# Altium PCB AWT25-000093_ZIM1.PcbDoc (part 2 of 4)
Units mm, origin at the board's own origin, x right, y up, seen from the top; angles counter-clockwise.
Board outline 210 x 108 mm, 6 copper layers (Top Layer, Mid-Layer 1, Internal Plane 2, Power, Mid-Layer 2, Bottom Layer); 303 components, 298 nets, 1319 pads, 1113 vias.
Unrouted connection lines stored in the file: 85.
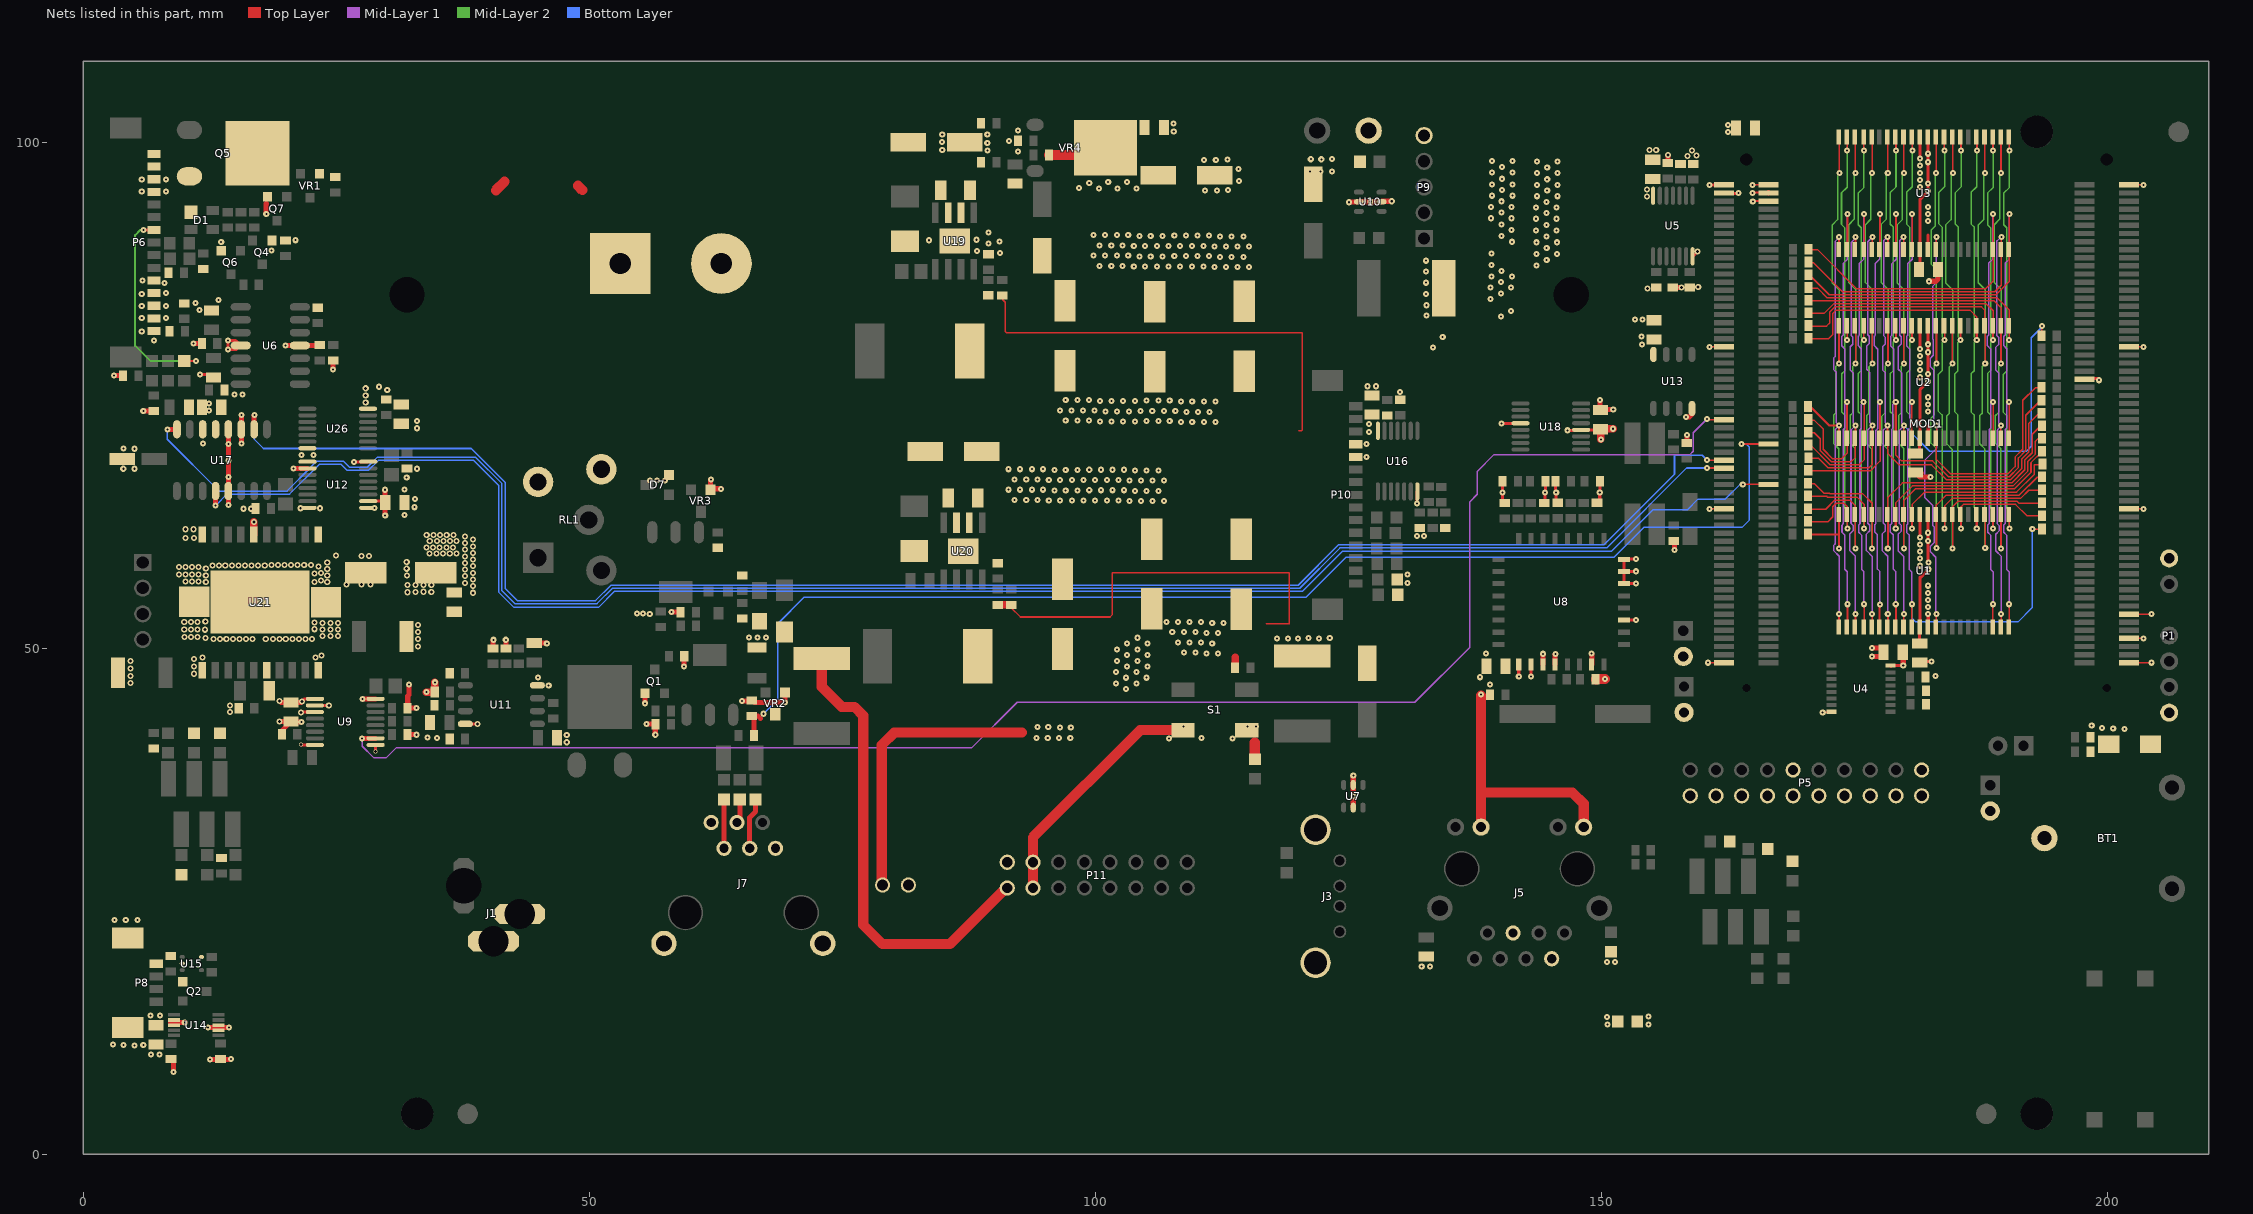
[diagram p6: the nets of this part, all layers, seen from the top]

## Via types
v1: diameter 0.6, hole 0.2, Top Layer to Bottom Layer, tented both sides, 894 vias
v2: diameter 0.6, hole 0.3, Top Layer to Bottom Layer, tented both sides, 199 vias
v3: diameter 0.6, hole 0.2, Top Layer to Bottom Layer, 18 vias
v4: diameter 0.4, hole 0.3, Top Layer to Bottom Layer, tented both sides, 2 vias

## Nets (pads, with @x,y where several pads share a name; then routed paths per layer and width w, separated by ;. In a path a pad name is that pad's centre, name@x,y a point inside that pad or via, vN(x,y) a via of type N, cw(c..) or ccw(c..) an arc to the next point about the centre after c; other vN are vias at no path point)
0VD: BT1.3 C1.2 C2.2 C3.2 C4.2 C5.2 C6.2 C16.2 C17.2 C18.2 C19.2 C20.2 C21.2 C22.2 C23.2 C24.2 C25.2 C28.2 C31.2 C32.2 C33.2 C34.2 C35.2 C36.2 C38.2 C39.2 C40.2 C41.2 C42.2 C47.2 C48.2 C49.2 C50.2 C51.2 C52.2 C53.2 C54.2 C55.2 C57.2 C58.2 C59.2 C60.2 C61.2 C62.2 C63.2 C64.2 C65.2 C66.2 C69.2 D3.2 D6.2 D7.2 D8.2 J1.2 J1.3 J5.10 J5.12 L8.1 L10.1 L25.1 L30.1 L36.1 L39.1 MOD1.A1 MOD1.A39 MOD1.A79 MOD1.A117 MOD1.B2 MOD1.B8 MOD1.B14 MOD1.B40 MOD1.B71 MOD1.B80 MOD1.B120 P1.7 P2.2 P4.2 P5.4 P5.6 P5.8 P5.10 P5.11 P5.12 P5.14 P5.16 P5.18 P5.20 P6.3 P6.4 P6.12 P6.13 P8.4 P8.5 P8.6 P10.11 P10.12 P11.3 P11.4 P12.2 P13.2 Q6.2 Q7.2 R38.2 R39.2 R42.2 R43.2 R57.2 R58.2 R69.2 R80.2 R81.2 R82.2 R83.2 R101.2 R107.2 R109.2 R110.2 R112.2 R118.2 R119.2 R124.2 RL1.A2 S1.3 S1.4 U1.12 U1.34 U2.12 U2.34 U3.12 U3.34 U4.8 U5.7 U6.11 U8.6 U8.7 U8.8 U8.27 U8.28 U8.31 U9.1 U9.3 U9.8 U9.9 U11.4 U12.1 U12.8 U12.9 U13.4 U14.2 U14.3 U15.2 U16.7 U17.11 U17.14 U18.4 U19.6 U19.9 U20.6 U20.9 U26.7 VR2.1 VR3.1 | length 175.9
  Top Layer w0.15: v1(160.518,48.565) MOD1.A1@162.1,48.565 ; v1(160.673,63.765) MOD1.A39@162.1,63.765 ; v1(160.673,79.765) MOD1.A79@162.1,79.765 ; v1(171.848,43.665) 172.729,43.665 U4.8@172.775,43.665 ; MOD1.B2@202.1,48.565 v1(204.307,48.565) ; MOD1.B8@202.1,50.965 v1(203.527,50.965) ; MOD1.B14@202.1,53.365 v1(204.307,53.365) ; MOD1.B40@202.1,63.765 v1(203.527,63.765) ; MOD1.B80@202.1,79.765 v1(203.527,79.765) ; MOD1.B120@202.1,95.765 v1(203.527,95.765)
  Top Layer w0.3: v1(11.55,77.05) C35.2@12.6,77.05 ; 15.179,79.5 v1(14.3,79.5) v1(14.3,80.4) 15.079,80.4 U6.11@15.579,79.9 ; v4(21.525,40.475) 21.555,40.445 U9.8@22.911,40.445 ; v2@21.595,43.695 U9.3@22.87,43.695 ; v2(21.65,44.75) 21.895,44.995 U9.1@22.911,44.995 ; U9.3@22.825,43.65 U9.3@22.87,43.695 ; U9.3@22.875,43.7 U9.3@22.87,43.695 ; U9.3@22.911,43.695 U9.3@22.87,43.695 ; v4(28.887,39.785) 28.887,40.432 U9.9@28.901,40.445 ; U11.4@37.769,42.52 38.97,42.52 v2(38.975,42.525) ; v3(131.75,64.275) 131.75,65.435 U16.7@131.8,65.485 U16.7@131.815,65.5 ; v1(140.109,72.201) 141.973,72.201 U18.4@141.993,72.221 ; v1(140.222,65.397) 140.222,64.559 C20.2@140.447,64.334 ; v1@140.223,65.398 R42.2@140.223,66.497 ; C21.2@144.347,64.334 144.422,64.409 v1(144.422,65.397) ; v1@144.459,65.434 R43.2@144.459,66.497 ; v1@145.46,65.459 R38.2@145.46,66.497 ; v1(145.522,65.397) 145.522,64.509 C18.2@145.672,64.359 ; C19.2@149.547,64.359 149.822,64.634 v1(149.822,65.397) ; v1@149.837,65.412 R39.2@149.837,66.475 ; v1(153.422,56.397) 152.247,56.397 U8.6@152.222,56.372 U8.7@152.222,57.572 ; v1(153.422,57.597) 152.247,57.597 U8.7@152.222,57.572 ; v1(153.422,58.797) 152.247,58.797 U8.8@152.222,58.772 U8.7@152.222,57.572 ; U5.7@159,88.71 v2(159.475,89.175) ; MOD1.A117@162.05,94.95 162.068,94.932 162.075,94.925 162.1,94.925 v1@163.5,94.925 ; U1.12@181.472,63.138 181.473,63.136 v1(181.473,60.946) ; U2.12@181.472,81.756 181.473,81.755 v1(181.473,79.564) ; v1@181.472,98.362 U3.12@181.472,100.438 ; C1.2@181.475,48.703 181.5,48.678 v1@182.489,48.678 ; C2.2@181.475,67.528 C2.2@181.681,67.322 ; U3.34@182.26,89.349 U3.34@182.272,89.338 ; U3.34@182.26,89.355 182.26,89.394 182.26,90.791 ; U1.34@182.272,52.038 182.272,52.094 v1@182.272,53.36 ; U2.34@182.272,70.656 182.272,70.744 182.272,71.978 ; MOD1.B71@197.654,76.621 197.7,76.621 198.999,76.621 v1(199.151,76.469)
  Top Layer w0.5: v1(10.9,80.1) R101.2@11.738,80.1 ; v1(12.325,12.525) 13.375,12.525 v1(14.4,12.525) ; v1(12.55,9.375) 13.575,9.375 v1@14.575,9.375 ; Q6.2@13.625,89.3 Q6.2@13.65,89.275 ; v1(15.65,70.225) 15.65,71.603 U17.11@15.63,71.623 15.65,71.643 v1(15.65,73.025) ; v1(18.1,92.9) 18.1,93.925 ; v2(19.425,44.775) 19.55,44.65 C47.2@20.55,44.65 21.55,44.65 v2(21.65,44.75) ; C47.2@20.425,44.775 20.45,44.75 C47.2@20.525,44.75 ; C47.2@20.5,44.775 C47.2@20.525,44.75 ; C47.2@20.55,44.725 C47.2@20.525,44.75 ; C47.2@20.55,44.75 C47.2@20.525,44.75 ; R83.2@41.775,49.987 v1@41.775,50.816 ; C39.2@44.575,50.5 v1@45.79,50.5 ; v1(55.65,42.5) R80.2@56.513,42.5 ; v1(56.525,41.45) 56.525,42.475 R80.2@56.525,42.488 ; v1@58.105,53.556 58.13,53.556 R109.2@59.018,53.556 ; VR3.1@61.994,65.646 v1@61.994,66.643 ; VR3.1@62.019,65.753 v1@63.004,65.753 ; v1(65.1,44.775) R82.2@65.988,44.775 ; R82.2@66.05,44.837 66.138,44.837 66.35,44.625 v1(69.35,44.625) VR2.1@69.35,45.608 ; U8.27@144.222,48.372 v1@144.222,49.447 ; U8.28@145.422,48.372 v1@145.422,49.397 ; U8.31@149.05,48.375 v1@149.05,49.45 ; v1(149.856,74.526) 149.856,73.576 149.906,73.576 v1(151.156,73.576) ; v1(158.325,72.85) 158.678,72.85 158.935,73.107 U13.4@158.935,73.683 ; C38.2@158.429,70.302 158.454,70.327 v1(158.454,71.052) ; v1(176.7,49.2) C5.2@177.8,49.2 ; v1(176.7,50) C5.2@177.7,50 ; C2.2@181,67.35 181.45,66.9 v1(182.5,66.9) ; v1(182.337,86.245) 183.045,86.245 183.25,86.45 C3.2@183.25,87.4
  Top Layer w1: P13.2@78.9,26.638 78.9,40.435 80.124,41.659 92.746,41.659 ; P11.3@93.821,26.313 93.821,28.853 93.821,31.312 104.418,41.909 ; 104.443,41.934 S1.3@107.967,41.934 ; L8.1@115.74,39.06 115.74,40.659 ; J5.12@138.105,32.325 v1@138.105,45.304 ; 138.135,35.736 147.132,35.736 148.235,34.632 J5.10@148.235,32.325 ; C23.2@149.482,46.933 149.499,46.95 v1(150.35,46.95)
  other v1: 14.6,9.4 6.7,9.85 7.55,9.85 5.069,10.768 3.994,10.793 5.95,10.8 2.969,10.843 154.63,12.817 154.655,13.616 3.119,23.14 4.219,23.14 5.394,23.165 47.783,40.709 107.267,41.059 113.55,41.1 96.42,41.109 97.52,41.109 34.961,41.134 94.196,41.134 95.295,41.134 110.475,41.15 34.036,41.159 47.783,41.434 96.495,42.184 97.57,42.184 94.271,42.209 95.345,42.209 115.025,42.25 115.875,42.25 108.725,42.275 138.075,45.425 138.975,46.4 137.985,47.133 182.6,48.7 145.45,49.425 144.225,49.45 138.6,49.475 149.025,49.475 45.808,50.482 41.759,50.832 65.8,51.05 66.625,51.05 67.45,51.075 182.26,53.371 55.981,53.381 55.331,53.406 54.706,53.431 58.13,53.581 182.26,54.071 182.26,54.771 182.26,55.471 182.26,56.171 181.473,58.146 181.473,58.846 181.473,59.546 181.473,60.246 31.775,63.15 21.5,63.825 23.425,63.825 28.8,63.85 32.75,63.925 103.368,64.528 104.493,64.528 105.643,64.528 106.793,64.528 95.395,64.578 96.52,64.578 97.67,64.578 98.82,64.578 99.969,64.603 101.144,64.603 102.269,64.603 91.996,64.653 93.171,64.653 94.296,64.653 32.775,64.75 103.918,65.528 105.043,65.528 106.218,65.528 95.945,65.578 97.07,65.578 98.245,65.578 99.394,65.603 100.544,65.603 101.694,65.603 102.819,65.603 91.421,65.653 92.571,65.653 93.721,65.653 94.846,65.653 31.75,65.675 63.004,65.728 56,66.55 103.368,66.553 104.493,66.553 105.643,66.553 106.793,66.553 56.7,66.575 57.475,66.575 95.395,66.603 96.52,66.603 97.67,66.603 98.82,66.603 99.969,66.628 101.144,66.628 102.269,66.628 62.029,66.678 91.996,66.678 93.171,66.678 94.296,66.678 103.918,67.553 105.043,67.553 106.218,67.553 95.945,67.603 97.07,67.603 98.245,67.603 99.394,67.628 100.544,67.628 101.694,67.628 102.819,67.628 91.421,67.678 92.571,67.678 93.721,67.678 94.846,67.678 3.975,67.725 5.1,67.725 21.6,69.075 22.775,69.075 5.075,69.7 4,69.725 11.85,70.225 32.975,71.725 32.975,72.425 182.26,73.389 12.45,73.5 182.26,74.089 12.45,74.175 182.26,74.789 181.473,76.764 181.473,77.464 181.473,78.164 181.473,78.864 133.361,79.699 134.31,80.724 153.3,82.45 154.025,82.45 11.5,83.4 5.8,83.8 8.2,83.8 11.1,84.1 13.4,84.4 5.8,85 8.2,85.1 111.766,87.647 112.891,87.647 114.041,87.647 115.19,87.647 103.793,87.697 104.918,87.697 106.068,87.697 107.217,87.697 108.367,87.722 109.542,87.722 110.667,87.722 100.394,87.772 101.569,87.772 102.694,87.772 112.316,88.647 113.441,88.647 114.616,88.647 104.343,88.697 105.468,88.697 106.643,88.697 107.792,88.722 108.942,88.722 110.092,88.722 111.216,88.722 99.819,88.772 100.969,88.772 102.119,88.772 103.243,88.772 90.597,89.022 88.297,89.222 111.766,89.672 112.891,89.672 114.041,89.672 115.19,89.672 103.793,89.722 104.918,89.722 106.068,89.722 107.217,89.722 108.367,89.747 109.542,89.747 110.667,89.747 100.394,89.797 101.569,89.797 102.694,89.797 89.447,89.972 90.547,90.172 83.548,90.297 88.272,90.347 112.316,90.672 113.441,90.672 114.616,90.672 104.343,90.722 105.468,90.722 106.643,90.722 107.792,90.747 108.942,90.747 110.092,90.747 111.216,90.747 99.819,90.797 100.969,90.797 102.119,90.797 103.243,90.797 89.447,91.072 182.26,92.185 182.26,92.885 182.26,93.585 163.525,94.95 5.8,95.1 8.2,95.1 110.817,95.196 112.016,95.196 113.116,95.245 181.473,95.56 114.191,96.17 181.473,96.26 5.8,96.3 8.2,96.3 181.473,96.96 121.189,97.095 122.239,97.095 123.363,97.095 114.141,97.32 181.473,97.66 110.717,98.22 111.891,98.22 113.066,98.27 121.276,98.3 122.314,98.295 123.388,98.32 181.473,98.36 92.346,99.07 89.347,99.169 84.873,99.219 89.322,99.919 84.848,99.994 91.446,100.119 84.873,100.744 89.322,100.744 162.475,100.975 107.742,101.044 92.371,101.144 162.475,101.7 107.717,101.819
  other v2: 21.55,43.65 154.725,99.225 155.4,99.225
  other v3: 130.825,56.45 130.825,57.275 126.8,68.9 126.8,70.175 126.9,75.875 127.725,75.875 13.65,90.125
0VM: C8.2 C9.2 C11.2 R128.2 R129.2 U21.1 U21.10 U21.11 U21.20 U21.21 U21.22 U21.23
  other v2: 14.5,43.7 14.5,44.35 4.7,46.55 4.675,47.25 10.95,47.475 4.7,47.975 10.95,48.2 4.7,48.725 10.95,48.925 11.8,49.075 22.95,49.075 23.575,49.275 33.1,50.175 12.875,50.9 13.525,50.9 14.15,50.9 14.8,50.9 15.45,50.9 16.1,50.9 16.75,50.9 18.05,50.9 18.75,50.925 19.4,50.925 20.025,50.925 20.675,50.925 21.325,50.925 21.975,50.925 22.625,50.925 33.075,50.925 12.1,51.025 10.025,51.125 10.675,51.125 11.325,51.125 23.65,51.2 24.425,51.2 25.175,51.2 33.075,51.6 10,51.85 10.65,51.85 11.3,51.85 12.05,51.825 23.65,51.85 24.425,51.85 25.175,51.85 22.875,51.875 33.075,52.275 23.65,52.5 24.425,52.5 25.175,52.5 22.875,52.525 10,52.6 10.65,52.6 11.3,52.6 12.075,52.625 38.525,55.475 38.525,56.125 27.5,56.275 28.4,56.275 26.025,56.3 37.75,56.425 24.125,56.525 12.125,56.55 22.85,56.55 10.125,56.575 10.775,56.575 11.425,56.575 23.5,56.7 38.525,56.775 37.75,57.125 24.125,57.175 12.125,57.2 9.475,57.3 10.125,57.3 10.775,57.3 11.425,57.3 22.85,57.375 23.525,57.425 38.525,57.425 37.75,57.775 24.125,57.825 12.125,57.875 9.475,58 10.125,58 10.775,58 11.425,58 23.25,58.075 38.525,58.1 12.775,58.175 13.425,58.175 14.05,58.175 14.7,58.175 15.35,58.175 16,58.175 16.65,58.175 17.3,58.175 17.95,58.175 18.625,58.2 19.275,58.2 19.9,58.2 20.55,58.2 21.2,58.2 21.85,58.2 22.5,58.2 37.75,58.425 24.125,58.475 38.525,58.75 37.75,59.075 27.525,59.1 28.25,59.1 24.975,59.15 34.225,59.35 34.925,59.35 35.575,59.35 36.225,59.35 36.875,59.35 38.525,59.4 37.75,59.75 33.925,59.95 34.575,59.95 35.225,59.95 35.9,59.95 36.55,59.95 38.525,60.05 37.75,60.4 34.25,60.575 34.95,60.575 35.6,60.575 36.25,60.575 36.9,60.575 38.525,60.75 10.125,60.875 10.95,60.875 37.75,61.05 33.95,61.175 34.6,61.175 35.25,61.175 35.925,61.175 36.575,61.175 10.125,61.75 10.925,61.75
0VS: C46.2 J3.5 J3.6 J7.1 J7.7 J7.8 L37.1 L39.2 P9.5 P14.1 U7.2 U7.5 U10.2 U10.5 | length 7.3
  Top Layer w0.5: v1@125.076,94.075 U10.2@125.976,94.075 ; U7.5@125.475,34.25 v1(125.475,35.375) U7.2@125.475,36.5 v1(125.475,37.425) ; U10.2@126.026,94.1 v1(127.176,94.1) U10.5@128.276,94.1 ; U10.5@128.326,94.15 v1(129.276,94.15)
  other v1: 150.606,12.817 150.556,13.566 132.236,18.565 133.036,18.565 150.556,18.99 151.331,18.99 125.051,94.05
+3V3: C4.1 C5.1 C16.1 C25.1 C28.1 C41.1 C42.1 C47.1 C48.1 C49.1 C59.1 C60.1 C61.1 C69.1 D10.2 J5.2 J5.5 L40.2 MOD1.A116 MOD1.A118 MOD1.A119 MOD1.A120 P1.1 P5.1 P5.2 P11.2 Q1.3 R36.1 R47.2 R48.2 R51.2 R52.1 R53.1 R56.1 R59.1 R60.1 R64.1 R75.1 R76.1 R84.1 R85.1 R86.1 R92.1 R93.1 R94.1 R95.2 R96.2 R102.1 R113.1 R114.2 R116.1 R127.1 R130.1 U4.16 U5.14 U6.4 U8.3 U8.25 U8.26 U9.2 U9.16 U11.8 U12.2 U12.10 U12.16 U14.7 U14.8 U16.14 U17.5 U17.12 U17.13 U18.12 U26.14 | length 97.7
  Top Layer w0.15: R114.2@91.671,54.269 91.671,54.006 92.596,53.081 101.444,53.081 101.644,53.281 101.644,57.43 119.164,57.43 119.164,52.431 119.139,52.406 116.865,52.406 ; v1(164.912,95.77) 164.917,95.765 MOD1.A120@166.5,95.765
  Top Layer w0.2: v1@164.938,95.008 MOD1.A118@166.5,95.008 ; v1@164.959,94.165 MOD1.A116@166.5,94.165
  Top Layer w0.3: U9.2@22.916,44.35 v2(24.275,44.35) ; v1(26.75,68.4) 28.155,68.4 U12.16@28.175,68.42 ; U12.10@28.175,64.52 C28.1@29.78,64.52 ; v1(141.822,47.197) U8.25@141.822,48.372 ; v1(143.022,47.197) U8.26@143.022,48.372 ; v1(146.632,71.526) 147.938,71.526 U18.12@147.983,71.571 149.782,71.571 149.851,71.571 C41.1@149.881,71.601 ; U8.3@152.222,52.772 152.247,52.797 v1(153.422,52.797) ; v1(160.673,95.765) MOD1.A119@162.1,95.765 ; U4.16@178.529,48.271 v1@179.771,48.271 ; U4.16@178.575,48.215 U4.16@178.588,48.202
  Top Layer w0.5: 8.625,13.025 8.975,13.025 v1(10.05,13.025) ; v1(8.918,8.144) R52.1@8.918,9.081 ; v1(14.35,64.125) U17.5@14.35,65.517 ; v1@14.35,66.95 v1(14.35,68.525) v1@14.35,70.15 ; U17.5@14.375,65.5 14.375,65.527 v1(14.375,66.925) ; v1(14.375,70.175) U17.12@14.375,71.608 ; v2(19.425,42.775) 20.375,42.775 C47.1@20.425,42.725 ; R51.2@19.638,41.5 19.638,41.838 C47.1@20.525,42.725 ; v1(20,79.9) U6.4@21.421,79.9 23.338,79.9 R59.1@23.4,79.962 ; C47.1@20.425,42.825 C47.1@20.525,42.725 ; C47.1@20.55,42.75 C47.1@20.525,42.725 ; v1@20.795,67.77 U12.2@22.185,67.77 ; v1(21.575,42.725) 20.55,42.725 C47.1@20.525,42.725 ; v1(24.7,77.525) R60.1@24.7,78.438 ; v1(27.601,45) U9.16@28.896,45 ; C28.1@29.825,64.475 v1(29.825,65.65) ; v1(29.85,63.1) C28.1@29.85,64.4 ; R53.1@32.038,41.475 v1@32.926,41.475 ; v1@32.214,46.412 32.214,45.4 32.076,45.262 32.076,44.1 v1@32.926,44.1 ; R56.1@40.5,49.987 v1@40.5,50.797 ; v1(55.531,44.558) Q1.3@55.531,45.544 ; v1(59.38,48.208) R64.1@59.38,49.207 ; R130.1@156.55,97.912 156.575,97.937 v2(156.575,98.7) ; v1(157.2,59.7) R48.2@157.2,60.588 ; MOD1.A118@166.5,94.965 MOD1.A118@166.5,95.008 ; v1(179.8,48.3) C5.1@179.8,49.55
  Top Layer w0.75: v1@33.911,45.633 R116.1@34.696,45.633 ; R116.1@34.738,45.675 34.761,45.698 v1(34.761,46.633) ; R113.1@90.372,54.281 R114.2@91.659,54.281 ; R36.1@113.804,48.083 113.804,49.12 ; C41.1@149.782,71.571 149.871,71.661 C41.1@149.887,71.676 ; v1(149.931,70.627) 149.931,71.451 150.006,71.526 C41.1@150.131,71.651 ; C41.1@150.131,71.676 v1(151.131,71.676)
  other v1: 6.65,13.7 7.6,13.725 32.951,41.45 32.951,44.075 33.911,45.658 103.043,45.958 46,46.325 32.201,46.425 102.044,46.508 104.068,46.508 44.925,47.1 103.043,47.083 105.068,47.083 182.973,47.258 102.044,47.633 104.068,47.633 103.118,48.183 105.143,48.183 102.119,48.732 104.143,48.732 103.118,49.307 105.143,49.307 110.991,49.482 112.116,49.482 108.767,49.557 109.892,49.557 102.119,49.857 104.143,49.857 103.118,50.457 105.143,50.457 111.541,50.482 108.167,50.557 109.317,50.557 110.442,50.557 40.534,50.832 104.143,51.032 110.991,51.507 112.116,51.507 107.592,51.582 108.767,51.582 109.892,51.582 111.541,52.506 112.666,52.506 107.017,52.581 108.167,52.581 109.317,52.581 110.442,52.581 15.85,63.775 16.6,63.775 31.975,66.85 33,67.725 20.775,67.75 30.05,75.5 29.25,75.825 164.938,94.144 164.912,94.982
  other v2: 27.925,74.275 27.925,74.975 27.925,75.675 154.525,85.55 154.475,94.6 154.475,95.325
  other v3: 127.025,71.35 127.025,72.125 130.075,75.3
+5VD: C8.1 C9.1 C52.1 C53.1 C54.1 L26.1 L32.1 L38.2 P6.5 P13.1 Q2.3 Q4.3 R50.1 R54.1 R63.1 R73.1 R97.1 R98.1 R99.1 R100.1 R104.1 R105.1 R106.1 R108.1 R111.1 R125.1 R126.1 U15.5 U21.6 | length 46.8
  Top Layer w0.15: R111.1@90.847,84.648 90.847,84.423 91.096,84.173 91.096,81.274 91.222,81.149 120.439,81.149 120.439,71.577 120.364,71.502 120.114,71.502
  Top Layer w0.5: v1(3.075,76.95) R99.1@3.888,76.95 ; v1(5.95,73.425) R98.1@6.987,73.425 ; R50.1@157.05,85.638 157.888,85.638 v2(157.9,85.65)
  Top Layer w0.75: U21.6@16.865,61.225 16.875,61.235 v2(16.875,62.475)
  other v1: 117.925,50.95 119.025,50.95 120.025,50.975 122.1,50.975 121.05,51 123.15,51 108.442,72.351 109.567,72.351 110.717,72.351 111.866,72.351 100.469,72.401 101.594,72.401 102.744,72.401 103.893,72.401 105.043,72.426 106.218,72.426 107.342,72.426 97.07,72.476 98.245,72.476 99.369,72.476 108.992,73.351 110.117,73.351 111.291,73.351 101.019,73.401 102.144,73.401 103.318,73.401 104.468,73.426 105.618,73.426 106.768,73.426 107.892,73.426 96.495,73.476 97.645,73.476 98.795,73.476 99.919,73.476 108.442,74.376 109.567,74.376 110.717,74.376 111.866,74.376 100.469,74.426 101.594,74.426 102.744,74.426 103.893,74.426 105.043,74.451 106.218,74.451 107.342,74.451 97.07,74.501 98.245,74.501 99.369,74.501 14.95,75.075 15.75,75.075 132.701,82.85 132.701,83.875 132.676,84.975 8.05,86.075 132.676,86.1 5.875,86.325 132.651,87.2 132.651,88.275 18.6,89.3 21,90.3
  other v2: 32.05,55.525 32.825,55.55 34.4,55.55 33.625,55.575 32.05,56.25 32.825,56.25 33.625,56.25 34.4,56.25 32,57.2 31.975,57.85 31.975,58.5 159.548,85.698 158.475,98.6 159.375,98.65 158.925,99.175
  other v3: 131.775,61.075 132.45,61.075
+VBAT: C1.1 C2.1 C3.1 C36.1 D10.1 R121.1 R122.1 U1.11 U1.33 U2.11 U2.33 U3.11 U3.33 U13.8 | length 38.6
  Top Layer w0.3: C2.1@181,69.25 181.426,69.676 U2.33@181.426,70.744 ; C1.1@181.429,50.471 U1.33@181.429,52.09 ; 181.472,57.008 181.472,56.958 ; U2.33@181.472,70.656 U2.33@181.472,70.688 ; U3.33@181.472,89.338 181.472,89.394 181.472,94.346 182.26,95.135 v1(182.26,95.16) ; 181.473,74.257 181.473,74.281 ; C1.1@181.475,50.227 C1.1@181.475,50.471 ; U1.33@181.475,52.034 181.472,52.038 181.472,52.094 181.472,56.958 ; C2.1@181.475,69.052 C2.1@181.49,69.2 ; U2.33@181.475,70.684 U2.33@181.472,70.688 ; C3.1@181.475,87.777 U3.33@181.475,88.915 ; U1.11@182.21,63.075 U1.11@182.272,63.138 ; U1.11@182.257,63.123 182.26,63.119 v1(182.26,61.403) v1(182.26,60.591) 182.26,58.508 v1(182.286,58.482) ; U2.11@182.272,81.756 182.235,81.719 v1(182.235,80.022) v1(182.235,79.234) 182.235,77.101 182.235,76.364 v1(182.26,76.339) 182.235,76.339 181.473,75.577 181.473,74.281 ; U3.11@182.272,100.438 182.26,100.426 v1(182.26,98.843) v1(182.26,98.005) v1(182.26,95.922) 182.26,95.185 182.273,95.173 v1@182.286,95.16 ; v1(182.286,57.797) 182.286,57.772 181.472,56.958 ; U2.33@181.472,70.688 181.472,70.744 181.472,74.28 181.473,74.281
  other v1: 201.643,42.009 200.544,42.084 199.444,42.109 198.419,42.384 182.26,77.101 153.975,80 153.95,80.8
+VH: D1.1 P6.1 P6.2 P6.14 P6.15 Q5.3 R103.1
  other v1: 7,80.4 5.8,81.3 5.8,82.6 8.2,82.6
+VS: C6.1 C10.1 C50.1 C51.1 C57.1 C58.1 P11.1 Q5.2 R49.1 R66.1 R89.1 R90.1 R115.1 R117.1 R120.1 RL1.14 U19.7 U20.7 U21.16 VR1.3 | length 47.6
  Top Layer w1: 40.775,95.225 41.65,96.1 ; 48.9,95.675 49.325,95.25 ; R49.1@72.976,48.632 72.976,46.183 74.951,44.209 76.2,44.209 77.075,43.334 77.075,22.664 78.975,20.765 85.623,20.765 91.234,26.376 P11.1@91.272,26.413
+VUN: C65.1 C66.1 L19.1 L24.1 L31.1 R123.1 VR4.2 | length 3.1
  Top Layer w1: R123.1@95.408,98.72 VR4.2@98.52,98.72
  other v1: 140.059,82.749 141.059,83.324 139.034,84.498 140.059,85.048 139.034,85.623 141.059,85.623 140.059,86.173 139.109,86.723 141.134,86.723 140.134,87.273 143.558,87.797 139.109,87.847 144.583,88.347 143.558,88.947 145.583,88.947 139.109,88.997 144.583,89.522 143.558,90.097 145.583,90.097 141.134,90.147 144.558,90.672 140.109,90.722 143.533,91.247 145.558,91.247 141.109,91.297 144.558,91.821 140.109,91.871 143.533,92.421 145.558,92.421 139.084,92.471 141.109,92.471 144.558,92.971 140.109,93.021 143.533,93.546 145.558,93.546 139.084,93.596 141.109,93.596 144.558,94.096 140.109,94.146 143.608,94.646 145.633,94.646 139.159,94.696 141.184,94.696 144.633,95.196 140.184,95.245 100.369,95.42 102.194,95.42 104.043,95.42 98.395,95.445 143.608,95.77 145.633,95.77 139.159,95.82 141.184,95.82 99.394,95.945 101.269,96.045 103.118,96.045 144.633,96.32 140.184,96.37 143.608,96.92 145.633,96.92 139.159,96.97 141.184,96.97 144.633,97.495 140.184,97.545 143.608,98.07 145.633,98.07 139.159,98.12 141.184,98.12
A0: R3.1 U1.5 U2.5 U3.5 | length 62.4
  Top Layer w0.15: R3.1@170.471,80.543 172.394,80.543 172.837,80.987 172.837,83.07 173.167,83.4 186.401,83.4 187.072,82.729 187.072,81.844 U2.5@187.072,81.788
  Top Layer w0.2: v1(187.061,61.835) 187.061,63.127 U1.5@187.072,63.138 ; v1(187.061,80.453) 187.061,81.777 U2.5@187.072,81.788 ; U3.5@187.072,100.438 187.086,100.423 v1(187.086,99.173)
  Mid-Layer 2 w0.15: v1@187.036,80.453 186.807,80.225 186.807,77.405 186.502,77.101 186.502,73.341 186.807,73.037 186.807,63.893 187.061,63.639 v1(187.061,61.835) ; v1@187.061,80.504 186.807,80.758 186.807,91.604 186.502,91.909 186.502,95.033 187.061,95.592 187.061,99.173 v1@187.061,99.224
A1: R5.1 U1.4 U2.4 U3.4 | length 69
  Top Layer w0.15: R5.1@170.471,81.818 172.221,81.818 172.537,82.135 172.537,83.201 173.04,83.705 187.544,83.705 187.872,83.376 187.872,81.844 187.872,81.788 187.899,81.76 v1(187.899,78.142) ; U1.4@187.872,63.138 187.899,63.11 v1(187.899,59.879) v1@187.874,59.854 ; v1(187.874,96.938) U3.4@187.874,100.392
  Mid-Layer 2 w0.15: v1@187.874,59.829 187.874,59.879 187.874,69.684 187.366,70.192 187.366,72.986 187.594,73.214 187.594,77.812 187.899,78.117 v1(187.899,78.142) 187.899,85.406 187.213,86.092 187.213,91.807 187.747,92.341 187.747,96.786 v1@187.874,96.913
A2: R7.1 U1.3 U2.3 U3.3 | length 62.6
  Top Layer w0.15: R7.1@170.471,83.068 171.972,83.068 172.913,84.009 188.001,84.009 188.687,83.324 188.687,81.844 188.687,81.802 188.677,81.793 U2.3@188.672,81.788
  Top Layer w0.2: U1.3@188.672,63.138 188.661,63.127 v1(188.687,61.835) ; U2.3@188.672,81.788 188.687,81.773 v1(188.687,80.453) ; U3.3@188.672,100.438 188.687,100.423 v1(188.687,99.173)
  Mid-Layer 2 w0.15: v1@188.661,80.479 v1@188.648,80.466 ; v1@188.687,61.861 188.687,63.664 188.433,63.918 188.433,73.062 188.128,73.367 188.128,77.126 188.433,77.431 188.433,80.25 v1@188.648,80.466 ; v1@188.687,80.428 188.674,80.441 v1@188.648,80.466 ; v1@188.687,99.148 188.687,95.516 188.128,94.957 188.128,91.833 188.433,91.528 188.433,80.682 v1@188.648,80.466
A3: R10.1 U1.2 U2.2 U3.2 | length 69.7
  Top Layer w0.15: R10.1@170.471,84.318 171.004,84.318 171.008,84.314 188.763,84.314 189.472,83.605 189.472,81.844 U2.2@189.472,81.788
  Top Layer w0.2: v1(189.449,78.142) 189.449,81.764 U2.2@189.472,81.788 ; U1.2@189.472,63.138 189.474,63.135 v1(189.474,59.854) ; U3.2@189.472,100.438 189.474,100.435 v1(189.474,96.938)
  Mid-Layer 2 w0.15: v1@189.449,59.854 189.449,69.709 188.89,70.268 188.89,72.96 189.22,73.291 189.22,77.888 189.461,78.129 189.474,78.142 189.474,85.432 188.788,86.118 188.788,91.833 189.322,92.366 189.322,96.811 v1@189.449,96.938
A4: R12.1 U1.1 U2.1 U3.1 | length 64.5
  Top Layer w0.15: R12.1@170.471,85.568 171.329,85.568 172.283,84.614 189.072,84.614 190.272,83.415 190.272,81.844 190.272,81.788 190.261,81.777 v1(190.261,80.453) ; U1.1@190.272,63.138 190.261,63.127 v1(190.287,61.835) ; U3.1@190.272,100.438 190.287,100.423 v1(190.287,99.173)
  Mid-Layer 2 w0.15: v1@190.236,80.403 190.007,80.174 190.007,77.355 189.703,77.05 189.703,73.291 190.007,72.986 190.007,63.842 190.261,63.588 190.261,61.835 v1@190.261,61.784 ; v1@190.287,80.428 v1(190.261,80.453) 190.033,80.682 190.033,91.528 189.728,91.833 189.728,94.957 190.287,95.516 v1@190.287,99.148
A5: R14.1 U1.44 U2.44 U3.44 | length 73.3
  Top Layer w0.15: R14.1@170.487,86.84 170.565,86.84 172.491,84.914 188.956,84.914 190.287,86.245 190.287,89.323 190.272,89.338 190.277,89.343 190.287,89.353 190.287,89.394 v1(190.287,92.874) ; v1(190.261,54.342) 190.261,52.094 190.261,52.048 U1.44@190.272,52.038 ; v1(190.261,74.332) 190.261,70.744 190.261,70.698 U2.44@190.272,70.688
  Mid-Layer 1 w0.15: v1@190.236,74.332 190.007,74.103 190.007,71.741 189.855,71.589 189.855,62.292 189.728,62.165 189.728,61.454 190.007,61.175 190.007,57.797 190.248,57.556 190.248,54.342 v1@190.248,54.329 ; v1@190.261,74.357 190.033,74.586 190.033,79.59 189.728,79.895 189.728,80.809 189.855,80.936 189.855,88.023 190.287,88.454 v1(190.287,92.874) v1@190.287,92.899 ; v1@190.274,54.304 v1@190.274,54.342 ; v1@190.274,74.345 v1@190.312,74.307
A6: R16.1 U1.43 U2.43 U3.43 | length 66.3
  Top Layer w0.15: R16.1@170.487,88.09 170.915,88.09 173.791,85.214 187.533,85.214 187.623,85.214 187.871,85.214 188.832,85.214 189.472,85.854 189.472,89.338 189.474,89.34 189.475,89.393 v1(189.499,90.639) ; v1(189.449,71.995) 189.449,70.744 189.449,70.711 U2.43@189.472,70.688 ; U1.43@189.472,52.038 189.474,52.04 189.474,52.094 v1(189.474,53.377)
  Mid-Layer 1 w0.15: 189.068,71.538 189.068,62.318 189.271,62.115 189.271,61.581 188.941,61.251 188.941,59.625 189.499,59.067 v1@189.499,53.377 ; 189.118,71.589 189.487,71.957 v1@189.499,71.97 ; v1@189.449,90.613 189.059,90.224 189.059,80.86 189.212,80.707 189.212,79.996 188.915,79.7 188.915,77.499 189.237,77.177 189.237,72.224 189.457,72.004 v1@189.482,71.978 ; v1@189.474,71.97 v1@189.482,71.978 ; v1@189.487,90.652 v1@189.499,90.664 ; v1@189.491,71.97 v1@189.482,71.978 ; v1@189.499,71.995 v1@189.482,71.978
A7: R18.1 U1.42 U2.42 U3.42 | length 72.2
  Top Layer w0.15: R18.1@170.487,89.34 171.367,89.34 175.193,85.514 187.747,85.514 187.931,85.514 188.687,86.27 U3.42@188.687,89.352 ; v1(188.661,54.342) 188.661,52.094 188.661,52.048 U1.42@188.672,52.038 ; U2.42@188.672,70.688 188.677,70.693 188.687,70.702 188.687,70.744 v1(188.687,74.332) ; U3.42@188.672,89.338 188.677,89.343 U3.42@188.687,89.352 ; v1(188.687,92.874) 188.687,89.394 U3.42@188.687,89.352
  Mid-Layer 1 w0.15: v1@188.636,74.357 188.433,74.561 188.433,79.564 188.102,79.895 188.102,80.809 188.229,80.936 188.229,88.023 188.661,88.454 188.661,92.874 v1@188.661,92.899 ; v1@188.661,74.357 188.661,74.332 188.433,74.103 188.433,71.741 188.28,71.589 188.28,62.292 188.153,62.165 188.153,61.454 188.433,61.175 188.433,57.797 188.674,57.556 188.674,54.342 v1@188.674,54.329 ; v1@188.737,92.874 v1@188.737,92.899
A8: R20.1 U1.27 U2.27 U3.27 | length 51.5
  Top Layer w0.15: R20.1@170.487,68.765 171.419,68.765 172.369,67.815 176.411,67.815 176.736,68.139 176.736,70.688 176.741,70.693 176.749,70.701 176.749,70.744 v1(176.749,71.995) ; v1(176.723,53.377) 176.723,52.094 176.723,52.05 U1.27@176.736,52.038 ; U3.27@176.736,89.338 176.741,89.343 176.749,89.351 176.749,89.394 v1(176.749,90.639)
  Mid-Layer 1 w0.15: 176.291,71.563 176.291,62.343 176.495,62.14 176.495,61.607 176.164,61.276 176.164,59.651 176.723,59.092 v1@176.723,53.402 ; 176.342,71.614 v1@176.723,71.995 ; v1@176.698,90.563 176.291,90.156 176.291,80.961 176.444,80.809 176.444,80.098 176.19,79.844 176.19,77.558 176.469,77.278 176.469,72.325 v1@176.723,72.071
A9: R22.1 U1.26 U2.26 U3.26 | length 57.5
  Top Layer w0.15: R22.1@170.462,70.015 170.677,70.015 172.577,68.115 175.459,68.115 175.936,68.592 U2.26@175.936,70.688 ; v1(175.885,74.332) 175.936,74.281 175.936,70.744 U2.26@175.936,70.688 ; U2.26@175.91,70.713 U2.26@175.936,70.688 ; U1.26@175.936,52.038 175.936,52.094 v1(175.936,54.342) ; U3.26@175.936,89.338 175.936,89.394 v1(175.936,92.874)
  Mid-Layer 1 w0.15: v1@175.885,74.357 175.656,74.586 175.656,79.59 175.352,79.895 175.352,80.809 175.479,80.936 175.479,88.023 175.91,88.454 v1@175.91,92.874 ; v1@175.898,74.319 175.656,74.078 175.656,71.716 175.529,71.589 175.529,62.292 175.402,62.165 175.402,61.454 175.682,61.175 175.682,57.797 175.923,57.556 v1@175.923,54.342
A10: R24.1 U1.25 U2.25 U3.25 | length 50.8
  Top Layer w0.15: R24.1@170.462,71.29 171.002,71.29 171.592,70.7 171.592,69.524 172.701,68.415 174.642,68.415 175.072,68.845 U2.25@175.072,70.688
  Top Layer w0.2: U1.25@175.072,52.038 175.072,52.094 v1(175.072,53.377) ; U2.25@175.072,70.688 175.077,70.693 175.098,70.714 175.098,70.744 v1(175.098,71.995) ; U3.25@175.072,89.338 175.072,89.394 v1(175.072,90.639)
  Mid-Layer 1 w0.15: 174.64,71.563 174.64,62.343 174.844,62.14 174.844,61.607 174.513,61.276 174.513,59.651 175.072,59.092 v1@175.072,53.402 ; 174.691,71.614 v1@175.072,71.995 ; v1(175.072,90.639) 175.072,90.486 174.666,90.08 174.666,80.885 174.818,80.733 174.818,80.022 174.564,79.768 174.564,77.482 174.844,77.202 174.844,72.249 v1(175.098,71.995)
A11: R26.1 U1.24 U2.24 U3.24 | length 57.1
  Top Layer w0.15: R26.1@170.462,72.54 170.997,72.54 171.897,71.64 171.897,69.643 172.826,68.715 173.697,68.715 174.272,69.29 U2.24@174.272,70.688
  Top Layer w0.2: v1(174.259,74.332) 174.259,70.744 174.259,70.7 U2.24@174.272,70.688 ; U1.24@174.272,52.038 174.272,52.094 v1@174.272,54.329 ; U3.24@174.272,89.338 174.277,89.343 174.285,89.351 174.285,89.394 v1(174.285,92.874)
  Mid-Layer 1 w0.15: v1@174.272,54.329 174.272,54.342 174.272,57.556 174.031,57.797 174.031,61.175 173.751,61.454 173.751,62.165 173.878,62.292 173.878,71.589 174.005,71.716 174.005,74.078 v1(174.259,74.332) 174.031,74.561 174.031,79.564 173.726,79.869 173.726,80.784 173.853,80.911 173.853,87.997 174.285,88.429 v1(174.285,92.874)
  other v1: 174.285,54.342
A12: R28.1 U1.22 U2.22 U3.22 | length 51.5
  Top Layer w0.15: U3.22@173.472,100.438 173.497,100.412 v1(173.497,96.938)
  Top Layer w0.152: R28.1@170.446,61.229 173.469,61.229
  Top Layer w0.2: v1(173.472,59.854) U1.22@173.472,63.137 ; v1(173.472,78.142) U2.22@173.472,81.787
  Mid-Layer 2 w0.15: v1@173.421,59.854 173.421,69.709 172.913,70.217 172.913,73.011 173.142,73.24 173.142,77.837 v1@173.447,78.142 ; v1@173.447,96.913 173.32,96.786 173.32,92.341 172.786,91.807 172.786,86.092 173.472,85.406 v1(173.472,78.142) v1@173.472,78.117
A13: R30.1 U1.21 U2.21 U3.21 | length 48.3
  Top Layer w0.15: R30.1@170.446,62.479 172.338,62.479 172.837,62.978 172.837,63.969 173.193,64.324 173.955,64.324 174.272,64.007 174.272,63.194 174.272,63.138 174.285,63.125 v1(174.285,61.835) ; v1(174.259,80.453) 174.259,81.775 U2.21@174.272,81.788 ; v1(174.259,99.173) 174.259,100.425 U3.21@174.272,100.438
  Mid-Layer 2 w0.15: v1(174.259,99.173) 174.259,95.541 173.701,94.982 173.701,91.858 174.005,91.553 174.005,80.707 v1(174.259,80.453) 174.005,80.199 174.005,77.38 173.726,77.101 173.726,73.341 174.005,73.062 174.005,63.918 174.285,63.639 v1(174.285,61.835)
A14: R31.1 U1.20 U2.20 U3.20 | length 54.7
  Top Layer w0.15: R31.1@170.446,63.729 172.14,63.729 173.04,64.629 174.513,64.629 175.072,64.07 175.072,63.194 U1.20@175.072,63.138 ; v1(175.072,59.854) U1.20@175.072,63.137 ; U2.20@175.072,81.788 175.098,81.762 v1(175.098,78.142) ; v1(175.072,96.938) U3.20@175.072,100.437
  Mid-Layer 2 w0.15: v1(175.072,59.854) 175.072,69.709 174.564,70.217 174.564,73.011 174.793,73.24 174.793,77.837 v1(175.098,78.142) 175.098,85.432 174.412,86.118 174.412,91.833 174.945,92.366 174.945,96.811 v1(175.072,96.938)
A15: R32.1 U1.19 U2.19 U3.19 | length 49
  Top Layer w0.15: R32.1@170.446,65.004 172.234,65.004 172.304,64.934 175.225,64.934 175.936,64.223 175.936,63.194 U1.19@175.936,63.138 ; v1(175.91,80.453) U2.19@175.936,81.788 ; v1(175.91,99.173) 175.91,100.412 U3.19@175.936,100.438 ; v1(175.936,61.835) U1.19@175.936,63.105
  Mid-Layer 2 w0.15: v1@175.885,80.479 v1@175.872,80.466 ; v1@175.91,61.861 175.91,63.664 175.631,63.943 175.631,73.087 175.352,73.367 175.352,77.126 175.631,77.405 175.631,80.225 v1@175.872,80.466 ; v1@175.91,80.428 175.898,80.441 v1@175.872,80.466 ; v1@175.91,99.148 175.91,95.516 175.352,94.957 175.352,91.833 175.656,91.528 175.656,80.682 v1@175.872,80.466
A16: R33.1 U1.18 U2.18 U3.18 | length 56.8
  Top Layer w0.15: R33.1@170.446,66.254 171.035,66.254 171.985,65.304 172.493,65.304 172.562,65.234 175.814,65.234 176.736,64.312 176.736,63.194 176.736,63.138 176.723,63.125 v1(176.723,59.854) ; v1(176.723,96.938) 176.723,100.425 U3.18@176.736,100.438 ; U2.18@176.736,81.788 176.723,81.775 v1(176.749,78.142)
  Mid-Layer 2 w0.15: v1@176.698,59.829 176.698,59.854 176.698,69.684 176.19,70.192 176.19,72.986 176.418,73.214 176.418,77.812 v1@176.723,78.117 ; v1(176.723,96.938) 176.596,96.811 176.596,92.366 176.063,91.833 176.063,86.118 176.749,85.432 v1(176.749,78.142)
A17: R34.1 U1.23 U2.23 U3.23 | length 45.8
  Top Layer w0.2: R34.1@170.437,73.815 170.687,73.815 172.507,71.995 v1(173.472,71.995) 173.472,70.744 U2.23@173.472,70.688 ; U1.23@173.472,52.038 173.472,52.094 v1(173.472,53.377) ; U3.23@173.472,89.338 173.472,89.394 v1(173.472,90.639)
  Mid-Layer 1 w0.15: v1@173.421,90.537 173.066,90.182 173.066,78.802 172.913,78.65 172.913,77.532 173.193,77.253 173.193,72.3 v1@173.447,72.046 ; v1@173.472,53.402 173.472,59.092 172.913,59.651 172.913,60.133 173.091,60.311 173.091,71.614 v1(173.472,71.995) v1@173.472,72.122
A18: R35.1 U1.28 U2.28 U3.28 | length 58.6
  Top Layer w0.15: R35.1@170.462,67.515 176.536,67.515 177.511,68.49 177.511,70.65 U2.28@177.473,70.688
  Top Layer w0.2: U1.28@177.46,52.056 177.46,52.094 177.46,54.317 v1@177.46,54.342 ; U2.28@177.473,70.688 177.478,70.693 177.511,70.725 177.511,70.744 v1(177.511,74.332) ; U3.28@177.473,89.338 177.478,89.343 177.485,89.35 177.485,89.394 v1(177.485,92.874)
  Mid-Layer 1 w0.15: v1@177.46,74.357 177.282,74.535 177.282,79.539 176.926,79.895 176.926,80.809 177.053,80.936 177.053,88.023 177.485,88.454 v1(177.485,92.874) v1@177.485,92.899 ; v1@177.498,54.355 177.498,57.581 177.257,57.822 177.257,61.2 176.977,61.48 176.977,62.191 177.104,62.318 177.104,71.513 177.282,71.69 177.282,74.103 v1(177.511,74.332)
  other v1: 177.485,54.317
ATOD_CSBAR: MOD1.A49 U17.16 | length 177.4
  Top Layer w0.15: v1(160.425,67.8) 162.033,67.8 162.049,67.816 MOD1.A49@162.054,67.821
  Top Layer w0.5: v1(8.35,71.6) 9.257,71.6 U17.16@9.28,71.623
  Bottom Layer w0.15: v1@8.318,71.627 8.318,71.6 8.318,70.632 13.425,65.525 20.15,65.525 22.5,67.875 22.5,67.9 23.075,68.475 25.725,68.475 26.325,67.875 28.075,67.875 29.05,68.85 38.801,68.85 41.375,66.276 41.375,55.675 42.644,54.406 50.782,54.406 52.301,55.925 120.184,55.925 124.163,59.905 150.506,59.905 158.402,67.8 v1(160.425,67.8)
ATOD_CSTARTBAR: MOD1.A51 U17.10 | length 169
  Top Layer w0.15: v1(160.425,68.575) 162.008,68.575 162.049,68.616 MOD1.A51@162.054,68.621
  Top Layer w0.5: U17.10@16.9,71.623 v1@16.9,73
  Bottom Layer w0.15: v1@17.039,73.025 v1(16.925,73.025) 16.925,70.625 17.825,69.725 38.35,69.725 41.7,66.375 41.7,55.9 42.894,54.706 50.632,54.706 52.151,56.225 120.034,56.225 124.038,60.229 150.256,60.229 157.205,67.178 157.205,69.002 157.252,69.05 159.95,69.05 v1(160.425,68.575)
ATOD_INTBAR: MOD1.A46 U17.4 | length 174.4
  Top Layer w0.15: v1(163.95,66.175) 166.49,66.175 MOD1.A46@166.5,66.165
  Top Layer w0.5: v1(13.075,64.075) U17.4@13.075,65.512
  Bottom Layer w0.15: v1@13.1,64.1 14.225,65.225 20.4,65.225 23.35,68.175 25.475,68.175 26.075,67.575 26.225,67.575 26.4,67.575 28.2,67.575 29.175,68.55 38.6,68.55 41.05,66.1 41.05,55.55 42.569,54.031 50.907,54.031 52.501,55.625 120.458,55.625 124.413,59.58 150.981,59.58 155.08,63.679 158.479,63.679 159.529,64.728 162.228,64.728 163.675,66.175 v1(163.95,66.175)
CASH_24V: J7.4 J7.6 L16.2 | length 5.1
  Top Layer w0.5: J7.4@65.825,30.225 65.825,30.235 65.825,33.25 66.425,33.85 L16.2@66.425,35.06
CASH_COIL: J7.2 L17.2 | length 4.8
  Top Layer w0.5: J7.2@63.325,30.24 L17.2@63.325,35.06
CASH_OPEN: MOD1.A61 U9.10 | length 162
  Top Layer w0.15: v1@160.46,72.565 MOD1.A61@162.1,72.565
  Top Layer w0.3: U9.10@28.701,41.075 U9.10@28.751,41.125
  Top Layer w0.5: v1(27.576,41.075) 28.701,41.075 U9.10@28.881,41.075
  Mid-Layer 1 w0.15: v1@27.513,41.075 v1@27.513,41.109 ; v1(27.576,41.075) 27.576,40.324 28.7,39.2 29.975,39.2 30.925,40.15 87.775,40.15 92.275,44.65 131.55,44.65 137,50.1 137,64.475 137.723,65.198 137.723,67.467 139.382,69.125 158.725,69.125 159.05,69.45 159.05,71.275 v1(160.4,72.625) ; v1@160.375,72.675 160.4,72.675 v1@160.6,72.675
CASH_RTN: J7.3 L18.2 | length 2.4
  Top Layer w0.5: J7.3@64.59,32.775 64.875,33.06 L18.2@64.875,35.06
CASH_TEST: MOD1.A56 R72.2 R82.1 VR2.3 | length 122.8
  Top Layer w0.2: v1(163.828,70.152) 163.841,70.165 MOD1.A56@166.5,70.165
  Top Layer w0.5: R82.1@66.05,43.313 R82.1@66.262,43.313 ; R72.2@66.262,41.375 R82.1@66.262,43.176 ; 66.662,43.313 66.837,43.138 66.925,43.05
  Bottom Layer w0.15: v1(67.225,43.525) 68.625,44.925 68.625,52.425 71.225,55.025 120.808,55.025 124.758,58.975 151.226,58.975 154.176,61.925 163.875,61.925 164.575,62.625 164.575,69.9 164.323,70.152 v1(163.828,70.152)
CLOCK: L15.2 P6.9 | length 20.8
  Top Layer w0.2: L15.2@10.01,78.375 v1(11.15,78.375)
  Top Layer w0.3: v1(5.975,91.325) P6.9@7.025,91.325
  Mid-Layer 2 w0.2: v1(5.975,91.325) 5.675,91.325 5.15,90.8 5.15,79.875 6.65,78.375 v1(11.15,78.375)
D0: R1.2 U1.7 U2.7 U3.7 | length 51.6
  Top Layer w0.15: U1.7@185.472,63.138 185.472,63.194 185.472,63.929 185.74,64.197 190.896,64.197 192.021,63.073 R1.2@193.492,63.071 R1.2@193.55,63.073
  Top Layer w0.2: v1(185.461,80.453) 185.461,81.777 U2.7@185.472,81.788 ; U1.7@185.472,63.138 185.486,63.123 v1(185.486,61.835) ; U3.7@185.472,100.438 185.486,100.423 v1(185.486,99.173)
  Mid-Layer 2 w0.15: v1@185.435,80.453 185.207,80.225 185.207,77.405 184.902,77.101 184.902,73.341 185.207,73.037 185.207,63.893 185.461,63.639 v1@185.461,61.835 ; v1@185.512,80.479 185.499,80.492 185.258,80.733 185.258,91.579 184.953,91.883 184.953,95.008 185.512,95.566 185.512,99.173 v1@185.512,99.199
D1: R2.2 U1.8 U2.8 U3.8 | length 58.5
  Top Layer w0.15: v1(184.648,78.142) 184.648,81.764 U2.8@184.672,81.788 ; U3.8@184.672,100.438 184.673,100.436 v1(184.699,96.938) ; v1(184.673,59.854) 184.673,63.194 184.673,63.969 185.232,64.528 191.023,64.528 191.242,64.309 193.492,64.309 R2.2@193.538,64.309
  Mid-Layer 2 w0.15: v1@184.623,59.803 184.623,59.854 184.623,69.658 184.115,70.166 184.115,72.96 184.369,73.214 184.369,77.812 v1@184.648,78.091 ; v1@184.648,96.913 184.521,96.786 184.521,92.341 183.988,91.807 183.988,86.092 184.673,85.406 184.673,78.142 v1@184.673,78.117
D2: R4.2 U1.9 U2.9 U3.9 | length 53.4
  Top Layer w0.15: v1(183.861,99.173) 183.861,100.426 U3.9@183.872,100.438 ; U1.9@183.872,63.138 U1.9@183.886,63.123 ; U2.9@183.872,81.788 183.886,81.773 v1(183.886,80.453) ; v1(183.886,61.835) U1.9@183.886,63.123 ; R4.2@193.538,65.609 193.492,65.609 192.206,65.609 191.425,64.828 184.669,64.828 183.886,64.045 183.886,63.194 U1.9@183.886,63.123
  Mid-Layer 2 w0.15: v1@183.861,80.453 183.632,80.225 183.632,77.405 183.276,77.05 183.276,73.392 183.632,73.037 183.632,63.893 183.886,63.639 v1(183.886,61.835) ; v1@183.886,80.504 183.632,80.758 183.632,91.604 183.327,91.909 183.327,95.033 183.886,95.592 183.886,99.173 v1@183.886,99.224
D3: R6.2 U1.10 U2.10 U3.10 | length 61
  Top Layer w0.15: v1(183.048,96.938) 183.073,100.436 U3.10@183.072,100.438 ; U1.10@183.073,63.136 183.073,63.194 183.073,64.147 184.054,65.128 191.268,65.128 193.03,66.89 193.517,66.89 R6.2@193.563,66.89
  Top Layer w0.2: U1.10@183.072,63.138 183.073,63.136 v1(183.073,59.879) ; U2.10@183.072,81.788 183.073,81.786 v1(183.073,78.142)
  Mid-Layer 2 w0.15: v1(183.048,96.938) 182.946,96.836 182.946,91.68 182.548,91.282 182.548,87.963 183.073,87.438 v1(183.073,78.142) 182.845,77.913 182.845,73.011 182.54,72.706 182.54,70.268 183.073,69.735 v1(183.073,59.879)
D4: R8.2 U1.13 U2.13 U3.13 | length 58.3
  Top Layer w0.15: U1.13@180.672,63.138 180.672,63.194 180.672,64.184 181.916,65.428 190.994,65.428 192.756,67.19 192.756,68.14 193.538,68.14 R8.2@193.563,68.14 ; U3.13@180.672,100.438 180.711,100.398 v1(180.711,99.173)
  Top Layer w0.2: v1(180.66,80.453) 180.66,81.776 U2.13@180.672,81.788 ; U1.13@180.672,63.138 180.686,63.124 v1(180.686,61.835)
  Mid-Layer 2 w0.15: v1@180.66,80.504 180.635,80.479 180.432,80.276 180.432,77.456 180.127,77.151 180.127,73.392 180.432,73.087 180.432,63.943 180.686,63.689 v1@180.686,61.886 ; v1@180.686,80.504 180.432,80.758 180.432,91.604 180.127,91.909 180.127,95.033 180.686,95.592 180.686,99.173 v1@180.686,99.224
D5: R9.2 U1.14 U2.14 U3.14 | length 66.2
  Top Layer w0.15: U1.14@179.872,63.138 U1.14@179.873,63.137 ; U2.14@179.872,81.788 179.873,81.787 v1(179.873,78.142) ; U3.14@179.872,100.438 179.873,100.437 v1(179.873,96.938) ; v1(179.873,59.854) U1.14@179.873,63.137 ; R9.2@193.538,69.415 193.498,69.415 192.42,68.338 192.42,67.372 190.776,65.728 180.997,65.728 179.873,64.604 179.873,63.194 U1.14@179.873,63.137
  Mid-Layer 2 w0.15: v1@179.847,96.913 179.72,96.786 179.72,92.341 179.187,91.807 179.187,86.092 179.873,85.406 v1(179.873,78.142) v1@179.873,78.117 ; v1(179.873,59.854) 179.873,69.709 179.339,70.243 179.339,72.986 179.593,73.24 179.593,77.837 v1@179.873,78.117 ; v1@179.898,78.142 179.885,78.129 v1@179.873,78.117
D6: R11.2 U1.15 U2.15 U3.15 | length 61.8
  Top Layer w0.15: U1.15@179.073,63.138 179.073,63.194 179.073,64.388 180.712,66.028 190.651,66.028 192.116,67.492 192.116,68.457 192.852,69.194 192.852,70.446 193.071,70.665 193.492,70.665 R11.2@193.538,70.665 ; U3.15@179.073,100.438 179.085,100.425 v1@179.085,99.199
  Top Layer w0.2: v1(179.06,61.835) 179.06,63.125 U1.15@179.073,63.138 ; U2.15@179.073,81.788 179.06,81.775 v1(179.085,80.453)
  Mid-Layer 2 w0.15: v1@179.06,80.479 178.831,80.25 178.831,77.431 178.527,77.126 178.527,73.367 178.831,73.062 178.831,63.918 179.085,63.664 v1@179.085,61.861 ; v1@179.085,80.479 178.831,80.733 178.831,91.579 178.527,91.883 178.527,95.008 179.085,95.566 v1(179.085,99.173) v1@179.085,99.199
D7: R13.2 U1.16 U2.16 U3.16 | length 70.1
  Top Layer w0.15: U1.16@178.273,63.138 178.273,63.194 178.273,64.883 179.717,66.328 190.512,66.328 191.811,67.626 191.811,68.577 192.547,69.313 192.547,71.132 193.331,71.915 193.492,71.915 R13.2@193.538,71.915 ; v1(178.273,96.938) U3.16@178.273,100.437
  Top Layer w0.2: v1(178.273,59.854) U1.16@178.273,63.137 ; U2.16@178.273,81.787 v1(178.298,78.142)
  Mid-Layer 2 w0.15: v1@178.247,59.829 178.247,59.854 178.247,69.684 177.688,70.243 177.688,72.935 178.044,73.291 178.044,77.888 v1@178.273,78.117 ; v1@178.273,96.963 178.26,96.951 178.146,96.836 178.146,92.391 177.612,91.858 177.612,86.143 178.298,85.457 v1@178.298,78.167
D8: R15.2 U1.29 U2.29 U3.29 | length 65
  Top Layer w0.152: U2.29@178.273,70.688 178.273,69.227 179.4,68.1 182.6,68.1 184.071,66.629 190.387,66.629 191.506,67.748 191.506,68.698 192.217,69.409 192.217,72.224 193.158,73.165 193.467,73.165 R15.2@193.513,73.165
  Top Layer w0.2: v1(178.247,71.995) 178.247,70.744 178.247,70.713 U2.29@178.273,70.688 ; U1.29@178.273,52.038 178.273,52.094 v1(178.273,53.377) ; U3.29@178.273,89.338 178.273,89.394 v1@178.273,90.613
  Mid-Layer 1 w0.15: 177.841,71.563 177.841,62.343 178.044,62.14 178.044,61.607 177.714,61.276 177.714,59.651 178.272,59.092 v1@178.272,53.402 ; 177.892,71.614 178.26,71.983 v1@178.281,72.004 ; v1(178.247,90.639) 177.858,90.249 177.858,80.885 178.01,80.733 178.01,80.022 177.756,79.768 177.756,77.482 178.036,77.202 178.036,72.249 178.268,72.016 v1@178.281,72.004 ; v1@178.29,71.995 v1@178.281,72.004 ; v1@178.298,72.021 v1@178.281,72.004
D9: R17.2 U1.30 U2.30 U3.30 | length 71.6
  Top Layer w0.15: U2.30@179.073,70.688 179.073,69.061 179.634,68.5 182.7,68.5 184.27,66.93 190.262,66.93 191.176,67.843 191.176,68.793 191.912,69.53 191.912,73.011 193.285,74.384 193.442,74.384 193.488,74.384 R17.2@193.488,74.44
  Top Layer w0.2: v1(179.06,74.332) 179.06,70.744 179.06,70.7 U2.30@179.073,70.688 ; U1.30@179.073,52.038 179.073,52.094 v1@179.073,54.329 ; U3.30@179.073,89.338 179.078,89.343 179.085,89.35 179.085,89.394 v1(179.085,92.874)
  Mid-Layer 1 w0.15: v1@179.035,74.357 178.781,74.103 178.781,71.741 178.654,71.614 178.654,62.318 178.527,62.191 178.527,61.48 178.806,61.2 178.806,57.822 179.047,57.581 v1@179.047,54.355 ; v1@179.047,54.329 v1@179.047,54.342 ; v1@179.085,74.332 179.073,74.345 178.857,74.561 178.857,79.564 178.552,79.869 178.552,80.784 178.679,80.911 178.679,87.997 179.111,88.429 v1@179.111,92.874
  other v1: 179.06,54.342
D10: R19.2 U1.31 U2.31 U3.31 | length 69.5
  Top Layer w0.15: U1.31@179.873,52.038 179.873,52.094 v1(179.873,53.377) ; U2.31@179.873,70.688 179.873,70.744 v1(179.873,71.995) ; U3.31@179.873,89.338 179.873,89.394 v1@179.873,90.639 ; R19.2@193.487,80.816 193.487,80.871 v1(193.487,81.825)
  Mid-Layer 1 w0.15: 179.416,71.538 179.416,62.318 179.619,62.115 179.619,61.581 179.289,61.251 179.289,59.625 179.847,59.067 179.847,53.377 v1@179.847,53.351 ; 179.466,71.589 v1@179.847,71.97 ; v1@179.847,90.613 v1@179.873,90.639 ; v1@179.847,90.664 v1(179.822,90.639) 179.458,90.275 179.458,80.911 179.61,80.758 179.61,80.047 179.314,79.751 179.314,77.549 179.636,77.228 179.636,72.275 v1@179.89,72.021
  Bottom Layer w0.15: v1(179.873,71.995) 182.413,69.455 191.963,69.455 192.446,69.938 192.446,80.657 193.487,81.698 v1(193.487,81.825)
D11: R21.2 U1.32 U2.32 U3.32 | length 71.7
  Top Layer w0.15: v1(180.66,54.342) 180.66,52.094 180.66,52.049 U1.32@180.672,52.038 ; v1(180.66,74.332) 180.66,70.744 180.66,70.699 U2.32@180.672,70.688 ; U3.32@180.672,89.338 180.677,89.343 180.686,89.351 180.686,89.394 v1(180.686,92.899) ; v1(192.547,61.763) 193.489,61.763 R21.2@193.501,61.775
  Mid-Layer 1 w0.15: v1@180.635,74.307 180.432,74.103 180.432,71.741 180.254,71.563 180.254,62.267 180.127,62.14 180.127,61.429 180.406,61.149 180.406,57.771 180.647,57.53 180.647,54.342 v1@180.647,54.304 ; v1(180.66,74.332) 180.432,74.561 180.432,79.564 180.127,79.869 180.127,80.784 180.254,80.911 180.254,87.997 180.686,88.429 v1@180.686,92.874 ; v1@180.673,54.329 v1@180.673,54.342
  Bottom Layer w0.15: v1(180.66,54.342) 180.66,52.974 181.041,52.593 191.125,52.593 192.547,54.016 v1(192.547,61.763)
D12: R23.2 U1.35 U2.35 U3.35 | length 63.2
  Top Layer w0.15: U3.35@183.072,89.338 183.073,89.339 183.073,89.394 v1(183.073,90.639) ; U1.35@183.073,52.005 183.073,52.094 v1(183.073,53.377) ; U2.35@183.083,70.677 U2.35@183.072,70.688 ; v1(183.099,71.995) 183.099,70.744 183.099,70.714 183.077,70.693 U2.35@183.072,70.688 ; R23.2@193.488,75.715 193.442,75.715 192.838,75.715 191.608,74.484 191.608,69.65 190.846,68.888 190.846,67.937 190.138,67.23 184.47,67.23 183.072,68.628 U2.35@183.072,70.688
  Mid-Layer 1 w0.15: v1@183.022,53.3 183.022,53.377 183.022,58.991 182.464,59.549 182.464,60.032 182.845,60.413 182.845,61.988 182.718,62.115 182.718,64.096 181.905,64.909 181.905,68.541 183.099,69.735 v1(183.099,71.995) v1@183.048,71.944 ; v1@183.053,90.618 v1(183.073,90.639) 183.073,86.118 182.692,85.737 182.692,80.555 182.768,80.479 182.768,78.929 182.464,78.625 182.464,77.837 182.836,77.465 182.836,72.275 v1@183.09,72.021